# EAGLE board inputsheild_4 (EAGLE 9.3.0)
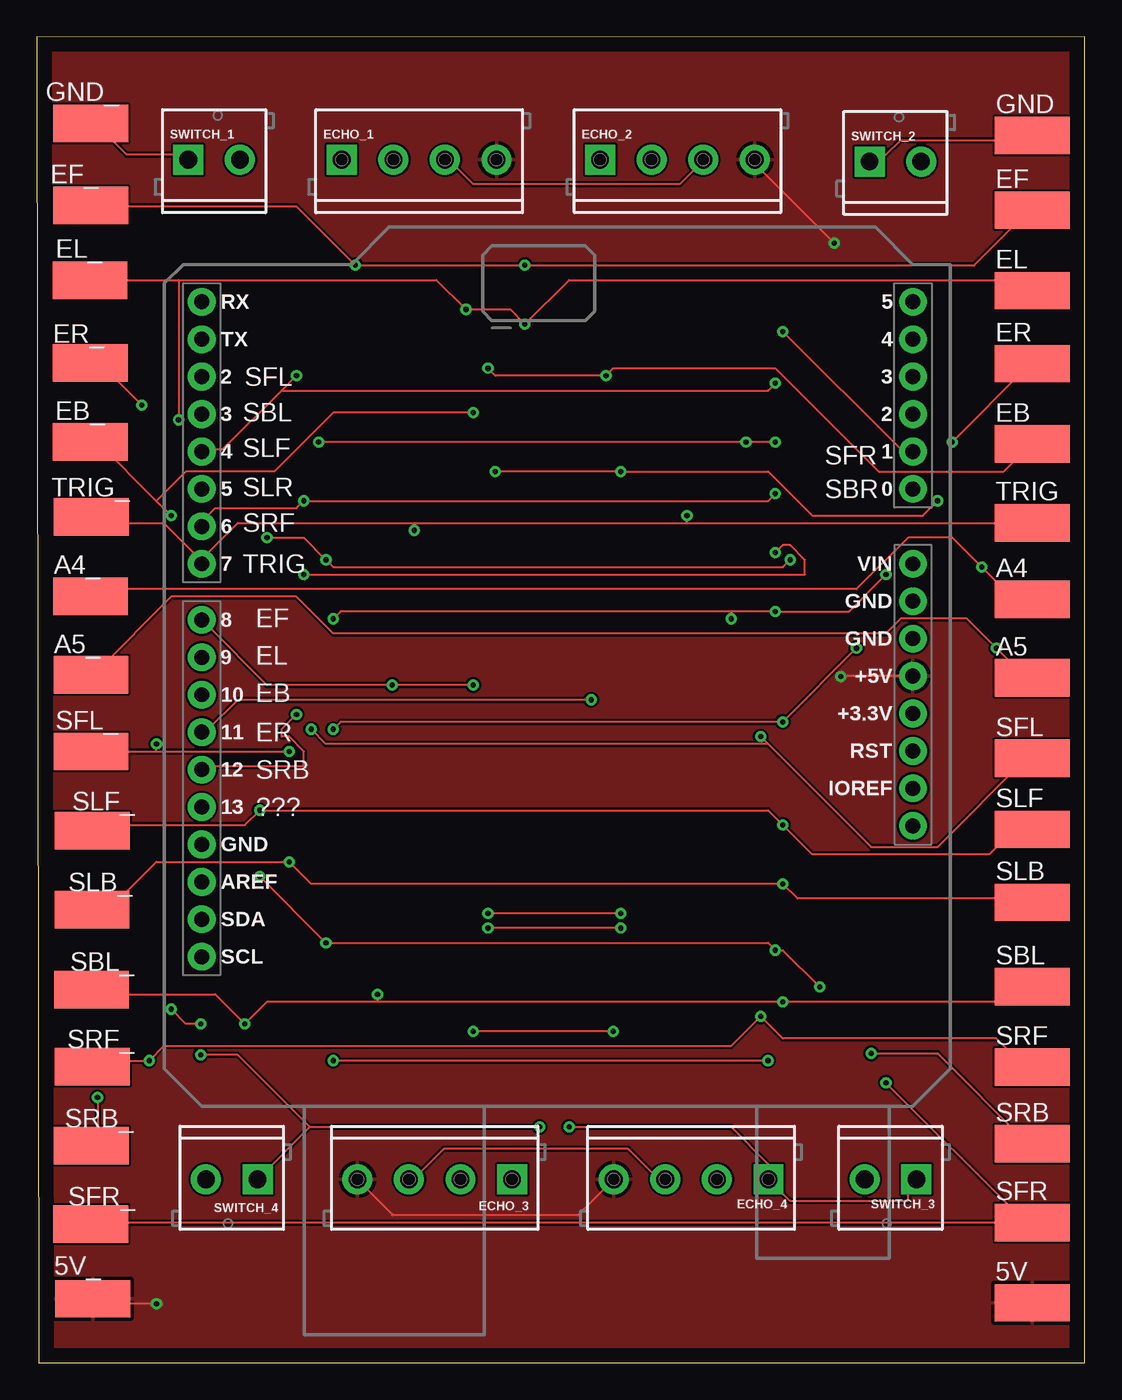
[diagram p0: board, top side]
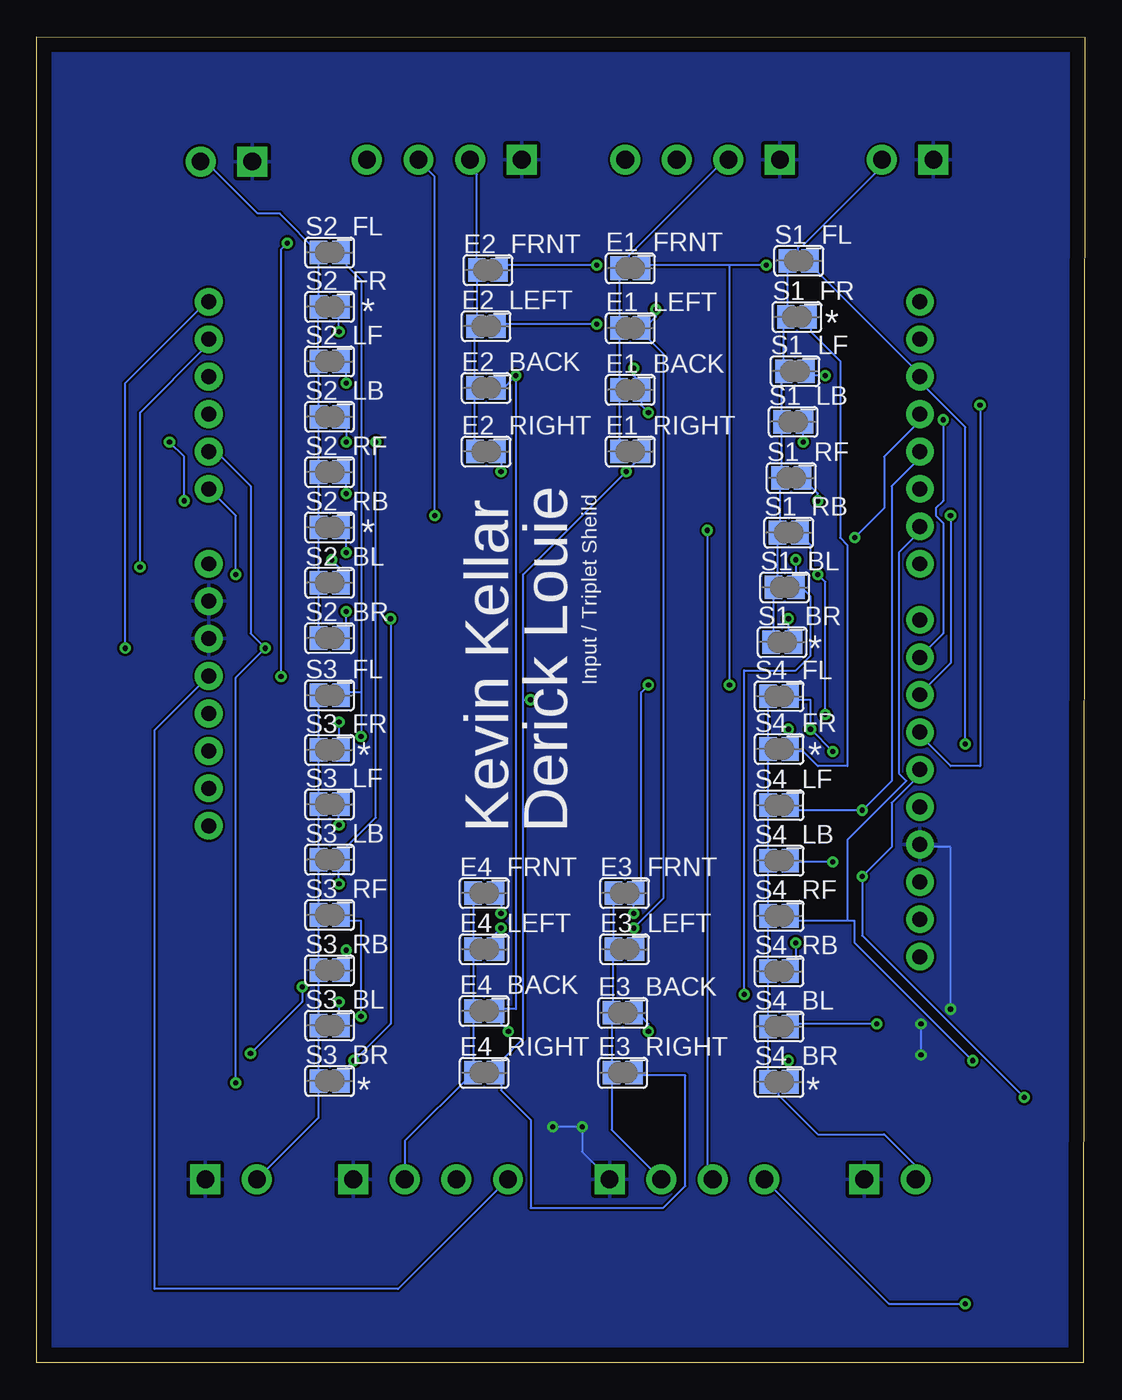
[diagram p1: board, bottom side, seen from below]

Size 71.12 x 90 mm. Coordinates in mm from the lower left corner, seen from the top.
Outline: 0.12,0 71.12,0 71.12,90 0,89.98 0.12,0
Copper layers (1*16): Top 0.035mm / dielectric 1.5mm / Bottom 0.035mm
Design rules "default": minimum track width 6mil, minimum drill 0.35mm, track to track 6mil, track to pad 6mil, pad to pad 6mil, via to via 6mil, smd to smd 6mil, copper to edge 40mil, drill to drill 6mil, minimum pad ring 10mil, minimum via ring 8mil, stop-mask expansion 4mil, vias tented up to drill 0mil, thermal gap 10mil

## Footprints (pad centres in the part's own frame; a part is rotated, then mirrored left to right if it is on the bottom)
SMD2,54-5,08 = smd 2.54 x 5.08: 1 0,0
UNO_R3_SHIELD = drill 1.016 pad 1.88: 3.3V 24.13,-2.54; 5V 24.13,0; A0 24.13,12.7; A1 24.13,15.24; A2 24.13,17.78; A3 24.13,20.32; A4 24.13,22.86; A5 24.13,25.4; AREF -24.13,-13.97; D2 -24.13,20.32; D3 -24.13,17.78; D4 -24.13,15.24; D5 -24.13,12.7; D6 -24.13,10.16; D7 -24.13,7.62; D8 -24.13,3.81; D9 -24.13,1.27; D10 -24.13,-1.27; D11 -24.13,-3.81; D12 -24.13,-6.35; D13 -24.13,-8.89; GND@0 24.13,2.54; GND@1 24.13,5.08; GND@2 -24.13,-11.43; IOREF 24.13,-7.62; NC 24.13,-10.16; RES 24.13,-5.08; RX -24.13,25.4; SCL -24.13,-19.05; SDA -24.13,-16.51; TX -24.13,22.86; VIN 24.13,7.62
SJ = smd 1.168 x 1.6: 1 -0.762,0; 2 0.762,0
SCREWTERMINAL-3.5MM-4 = drill 1.2 pad 2.032 square: 1 0,0 | drill 1.2 pad 2.032: 2 3.5,0; 3 7,0; 4 10.5,0
SCREWTERMINAL-3.5MM-2 = drill 1.2 pad 2.032 square: 1 0,0 | drill 1.2 pad 2.032: 2 3.5,0

## Placement (x,y rotation side)
5V  [SMD2,54-5,08]  67.55,4.06 270 top
5V_  [SMD2,54-5,08]  3.78,4.34 90 top
A4  [SMD2,54-5,08]  67.55,51.82 270 top
A4_  [SMD2,54-5,08]  3.64,52.04 270 top
A5  [SMD2,54-5,08]  67.55,46.48 270 top
A5_  [SMD2,54-5,08]  3.67,46.7 270 top
B1  ARDUINO_UNO_R3_SHIELDBASIC  [UNO_R3_SHIELD]  35.32,46.61 0 top
E1_BACK  [SJ]  30.85,66.04 0 bottom
E1_FRNT  [SJ]  30.85,74.3 0 bottom
E1_LEFT  [SJ]  30.85,70.23 0 bottom
E1_RIGHT  [SJ]  30.85,61.85 0 bottom
E2_BACK  [SJ]  40.63,66.17 0 bottom
E2_FRNT  [SJ]  40.5,74.17 0 bottom
E2_LEFT  [SJ]  40.63,70.36 0 bottom
E2_RIGHT  [SJ]  40.63,61.85 0 bottom
E3_BACK  [SJ]  31.36,23.75 0 bottom
E3_FRNT  [SJ]  31.23,31.88 0 bottom
E3_LEFT  [SJ]  31.23,28.07 0 bottom
E3_RIGHT  [SJ]  31.36,19.68 0 bottom
E4_BACK  [SJ]  40.76,23.88 0 bottom
E4_FRNT  [SJ]  40.76,31.88 0 bottom
E4_LEFT  [SJ]  40.76,28.07 0 bottom
E4_RIGHT  [SJ]  40.76,19.68 0 bottom
EB  [SMD2,54-5,08]  67.55,62.36 270 top
EB_  [SMD2,54-5,08]  3.62,62.51 270 top
ECHO_1  [SCREWTERMINAL-3.5MM-4]  20.69,81.66 0 top
ECHO_2  [SCREWTERMINAL-3.5MM-4]  38.22,81.66 0 top
ECHO_3  [SCREWTERMINAL-3.5MM-4]  32.25,12.45 180 top
ECHO_4  [SCREWTERMINAL-3.5MM-4]  49.65,12.45 180 top
EF  [SMD2,54-5,08]  67.55,78.23 270 top
EF_  [SMD2,54-5,08]  3.67,78.55 90 top
EL  [SMD2,54-5,08]  67.55,72.77 270 top
EL_  [SMD2,54-5,08]  3.6,73.46 270 top
ER  [SMD2,54-5,08]  67.55,67.82 270 top
ER_  [SMD2,54-5,08]  3.62,67.87 270 top
GND  [SMD2,54-5,08]  67.55,83.31 270 top
GND_  [SMD2,54-5,08]  3.65,84.12 90 top
S1_BL  [SJ]  20.37,52.63 0 bottom
S1_BR  [SJ]  20.54,48.91 0 bottom
S1_FL  [SJ]  19.41,74.8 0 bottom
S1_FR  [SJ]  19.54,70.98 0 bottom
S1_LB  [SJ]  19.79,63.87 0 bottom
S1_LF  [SJ]  19.67,67.3 0 bottom
S1_RB  [SJ]  20.1,56.35 0 bottom
S1_RF  [SJ]  19.92,60.05 0 bottom
S2_BL  [SJ]  51.25,52.94 0 bottom
S2_BR  [SJ]  51.25,49.19 0 bottom
S2_FL  [SJ]  51.25,75.36 0 bottom
S2_FR  [SJ]  51.25,71.67 0 bottom
S2_LB  [SJ]  51.25,64.21 0 bottom
S2_LF  [SJ]  51.25,67.97 0 bottom
S2_RB  [SJ]  51.25,56.7 0 bottom
S2_RF  [SJ]  51.25,60.46 0 bottom
S3_BL  [SJ]  51.25,22.88 0 bottom
S3_BR  [SJ]  51.25,19.12 0 bottom
S3_FL  [SJ]  51.25,45.3 0 bottom
S3_FR  [SJ]  51.25,41.6 0 bottom
S3_LB  [SJ]  51.25,34.15 0 bottom
S3_LF  [SJ]  51.25,37.9 0 bottom
S3_RB  [SJ]  51.25,26.64 0 bottom
S3_RF  [SJ]  51.25,30.39 0 bottom
S4_BL  [SJ]  20.75,22.82 0 bottom
S4_BR  [SJ]  20.75,19.06 0 bottom
S4_FL  [SJ]  20.75,45.24 0 bottom
S4_FR  [SJ]  20.75,41.66 0 bottom
S4_LB  [SJ]  20.75,34.08 0 bottom
S4_LF  [SJ]  20.75,37.84 0 bottom
S4_RB  [SJ]  20.75,26.57 0 bottom
S4_RF  [SJ]  20.75,30.33 0 bottom
SBL  [SMD2,54-5,08]  67.55,25.53 270 top
SBL_  [SMD2,54-5,08]  3.71,25.33 90 top
SFL  [SMD2,54-5,08]  67.55,41.02 270 top
SFL_  [SMD2,54-5,08]  3.67,41.49 90 top
SFR  [SMD2,54-5,08]  67.55,9.53 270 top
SFR_  [SMD2,54-5,08]  3.67,9.39 90 top
SLB  [SMD2,54-5,08]  67.55,31.24 270 top
SLB_  [SMD2,54-5,08]  3.75,30.76 90 top
SLF  [SMD2,54-5,08]  67.55,36.2 270 top
SLF_  [SMD2,54-5,08]  3.75,36.11 90 top
SRB  [SMD2,54-5,08]  67.55,14.86 270 top
SRB_  [SMD2,54-5,08]  3.69,14.72 90 top
SRF  [SMD2,54-5,08]  67.55,20.07 270 top
SRF_  [SMD2,54-5,08]  3.75,20.09 90 top
SWITCH_1  [SCREWTERMINAL-3.5MM-2]  10.28,81.66 0 top
SWITCH_2  [SCREWTERMINAL-3.5MM-2]  56.51,81.53 0 top
SWITCH_3  [SCREWTERMINAL-3.5MM-2]  59.68,12.45 180 top
SWITCH_4  [SCREWTERMINAL-3.5MM-2]  14.98,12.45 180 top
TRIG  [SMD2,54-5,08]  67.55,57.02 270 top
TRIG_  [SMD2,54-5,08]  3.68,57.42 270 top

## Library data of the parts
5V 5V_ A4 A4_ A5 A5_ EB EB_ EF EF_ EL EL_ ER ER_ GND GND_ SBL SBL_ SFL SFL_ SFR SFR_ SLB SLB_ SLF SLF_ SRB SRB_ SRF SRF_ TRIG TRIG_ = wirepad
B1 = SparkFun-Boards
E1_BACK E1_FRNT E1_LEFT E1_RIGHT E2_BACK E2_FRNT E2_LEFT E2_RIGHT E3_BACK E3_FRNT E3_LEFT E3_RIGHT E4_BACK E4_FRNT E4_LEFT E4_RIGHT S1_BL S1_BR S1_FL S1_FR S1_LB S1_LF S1_RB S1_RF S2_BL S2_BR S2_FL S2_FR S2_LB S2_LF S2_RB S2_RF S3_BL S3_BR S3_FL S3_FR S3_LB S3_LF S3_RB S3_RF S4_BL S4_BR S4_FL S4_FR S4_LB S4_LF S4_RB S4_RF = jumper
ECHO_1-ECHO_4 = SparkFun-Connectors; PROD_ID: 2xCONN-08399; SF_ID: 2xPRT-08084
SWITCH_1-SWITCH_4 = SparkFun-Connectors; PROD_ID: CONN-08399

## Nets
+5V: 5V.1 5V_.1 B1.5V ECHO_1.4 ECHO_2.4 ECHO_3.4 ECHO_4.4
A4: A4.1 A4_.1 B1.A4
A5: A5.1 A5_.1 B1.A5
E1: E1_BACK.1 E1_FRNT.1 E1_LEFT.1 E1_RIGHT.1 ECHO_1.2
E2: E2_BACK.1 E2_FRNT.1 E2_LEFT.1 E2_RIGHT.1 ECHO_2.2
E3: E3_BACK.1 E3_FRNT.1 E3_LEFT.1 E3_RIGHT.1 ECHO_3.2
E4: E4_BACK.1 E4_FRNT.1 E4_LEFT.1 E4_RIGHT.1 ECHO_4.2
EB: B1.D10 E1_BACK.2 E2_BACK.2 E3_BACK.2 E4_BACK.2 EB.1 EB_.1
EF: B1.D8 E1_FRNT.2 E2_FRNT.2 E3_FRNT.2 E4_FRNT.2 EF.1 EF_.1
EL: B1.D9 E1_LEFT.2 E2_LEFT.2 E3_LEFT.2 E4_LEFT.2 EL.1 EL_.1
ER: B1.D11 E1_RIGHT.2 E2_RIGHT.2 E3_RIGHT.2 E4_RIGHT.2 ER.1 ER_.1
GND: B1.GND@0 B1.GND@1 B1.GND@2 ECHO_1.1 ECHO_2.1 ECHO_3.1 ECHO_4.1 GND.1 GND_.1 SWITCH_1.1 SWITCH_2.1 SWITCH_3.1 SWITCH_4.1
S1: S1_BL.1 S1_BR.1 S1_FL.1 S1_FR.1 S1_LB.1 S1_LF.1 S1_RB.1 S1_RF.1 SWITCH_1.2
S2: S2_BL.1 S2_BR.1 S2_FL.1 S2_FR.1 S2_LB.1 S2_LF.1 S2_RB.1 S2_RF.1 SWITCH_2.2
S3: S3_BL.1 S3_BR.1 S3_FL.1 S3_FR.1 S3_LB.1 S3_LF.1 S3_RB.1 S3_RF.1 SWITCH_3.2
S4: S4_BL.1 S4_BR.1 S4_FL.1 S4_FR.1 S4_LB.1 S4_LF.1 S4_RB.1 S4_RF.1 SWITCH_4.2
SBL: B1.D3 S1_BL.2 S2_BL.2 S3_BL.2 S4_BL.2 SBL.1 SBL_.1
SBR: B1.A0 S1_BR.2 S2_BR.2 S3_BR.2 S4_BR.2
SFL: B1.D2 S1_FL.2 S2_FL.2 S3_FL.2 S4_FL.2 SFL.1 SFL_.1
SFR: B1.A1 S1_FR.2 S2_FR.2 S3_FR.2 S4_FR.2 SFR.1 SFR_.1
SLB: S1_LB.2 S2_LB.2 S3_LB.2 S4_LB.2 SLB.1 SLB_.1
SLF: B1.D4 S1_LF.2 S2_LF.2 S3_LF.2 S4_LF.2 SLF.1 SLF_.1
SLR: B1.D5
SRB: B1.D12 S1_RB.2 S2_RB.2 S3_RB.2 S4_RB.2 SRB.1 SRB_.1
SRF: B1.D6 S1_RF.2 S2_RF.2 S3_RF.2 S4_RF.2 SRF.1 SRF_.1
TRIG: B1.D7 ECHO_1.3 ECHO_2.3 ECHO_3.3 ECHO_4.3 TRIG.1 TRIG_.1

## Tracks (layer width: path | path; a pad name or v marks a point on that pad's centre or on a via)
+5V  (via drill 0.35)
  Top 0.152: ECHO_4.4 36.7,10 24.12,10 24.12,10.08 ECHO_3.4 | v8.12,4 4.12,4 5V_.1 | B1.5V 54.58,46.61 v54.55,46.57 | v54.12,76 48.72,81.4 ECHO_2.4
  Bottom 0.152: ECHO_3.4 13.3,4 v8.12,4 | ECHO_4.4 46.59,5 63.12,5 63.12,42.94 B1.5V | v54.55,46.57 54.55,75.57 v54.12,76
  pour Top: 0.12,90 71.12,90 71.12,0 0.12,0
A4  (via drill 0.35)
  Top 0.152: A4.1 67.12,52 66.12,52 v64.12,54 62.12,56 59.12,56 55.62,52.5 4.12,52.5 A4_.1
  Bottom 0.152: v64.12,54 64.12,64.5 59.62,69 B1.A4
A5  (via drill 0.35)
  Top 0.152: A5.1 67.12,46.5 v65.12,48.5 63.12,50.5 58.62,50.5 57.62,49.5 20.12,49.5 17.62,52 9.12,52 4.12,47 A5_.1
  Bottom 0.152: v65.12,48.5 65.12,66.5 59.62,72 B1.A5
E1
  Bottom 0.152: ECHO_1.2 24.43,81.66 30.9,75.19 30.9,75.01 E1_FRNT.1 E1_LEFT.1 E1_BACK.1 E1_RIGHT.1
E2
  Bottom 0.152: E2_RIGHT.1 E2_BACK.1 41.39,70 | 41.39,70 E2_LEFT.1 | 41.39,70 41.27,70.13 E2_FRNT.1 41.27,80.65 41.72,81.1 ECHO_2.2
E3
  Bottom 0.152: E3_FRNT.1 E3_LEFT.1 31.99,28 31.99,27.62 31.99,23.88 E3_BACK.1 E3_RIGHT.1 32.12,15.82 ECHO_3.2
E4
  Bottom 0.152: E4_FRNT.1 E4_LEFT.1 E4_BACK.1 E4_RIGHT.1 46.15,15.06 ECHO_4.2
EB  (via drill 0.35)
  Top 0.152: 8.12,58.5 4.12,62.5 EB_.1 | 8.12,58.5 v9.12,57.5 | v39.12,22.5 v29.62,22.5 | v30.62,67.5 31.12,67 v38.62,67 39.12,67.5 50.12,67.5 57.12,60.5 65.62,60.5 67.12,62 EB.1 | 8.12,58.5 10.12,60.5 16.12,60.5 20.12,64.5 v29.62,64.5
  Bottom 0.152: v9.12,57.5 9.12,47.5 11.12,45.5 B1.D10 | v29.62,22.5 29.62,23 30.12,23.5 E3_BACK.2 | v39.12,22.5 39.62,23 39.62,23.5 E4_BACK.2 39.62,24 38.62,24 v38.62,67 39.62,66 E2_BACK.2 | v30.62,67.5 30.62,67 30.12,66.5 E1_BACK.2 30.12,66 30.12,65 v29.62,64.5
EF  (via drill 0.35)
  Top 0.152: v39.62,30.5 v30.62,30.5 | v29.62,46 v24.12,46 15.62,46 11.62,50 B1.D8 | EF_.1 4.12,78.5 17.62,78.5 v21.62,74.5 v33.12,74.5 63.62,74.5 67.12,78 EF.1
  Bottom 0.152: v30.62,30.5 30.62,31.5 E3_FRNT.2 30.12,32 30.12,45.5 v29.62,46 | v39.62,30.5 39.62,31.5 E4_FRNT.2 | v21.62,74.5 24.12,74.5 | 24.12,74.5 29.62,74.5 E1_FRNT.2 | v33.12,74.5 39.62,74.5 E2_FRNT.2 | 24.12,74.5 v24.12,46
EL  (via drill 0.35)
  Top 0.152: v39.62,29.5 v30.62,29.5 | 9.62,73.5 3.62,73.5 EL_.1 | 9.62,73.5 27.12,73.5 v29.12,71.5 32.12,71.5 v33.12,70.5 36.12,73.5 66.62,73.5 67.12,73 EL.1 | 9.62,73.5 v9.62,64
  Bottom 0.152: v39.62,29.5 40.12,29 40.12,28.5 E4_LEFT.2 | E3_LEFT.2 30.62,28.5 v30.62,29.5 28.62,31.5 28.62,68.5 29.62,69.5 29.62,70 E1_LEFT.2 29.62,70.5 29.12,71 v29.12,71.5 | v33.12,70.5 39.62,70.5 E2_LEFT.2 | v9.62,64 9.62,58.5 10.12,58 10.12,57.5 9.62,57 9.62,49.5 11.12,48 B1.D9
ER  (via drill 0.35)
  Top 0.152: v7.12,65 4.62,67.5 4.12,67.5 ER_.1 | v31.12,60.5 v39.62,60.5 49.62,60.5 52.62,57.5 60.12,57.5 v61.12,58.5 | v62.12,62.5 67.12,67.5 ER.1 | v37.62,45 13.62,45 11.62,43 B1.D11
  Bottom 0.152: v7.12,65 7.12,40.5 9.12,40.5 11.12,42.5 B1.D11 | v39.62,60.5 39.62,61.5 E2_RIGHT.2 | E1_RIGHT.2 30.12,61.5 v31.12,60.5 38.12,53.5 38.12,45 | E3_RIGHT.2 30.12,19.5 27.12,19.5 27.12,12 28.62,10.5 37.62,10.5 37.62,16.5 39.62,18.5 39.62,19.5 E4_RIGHT.2 39.62,20 39.62,20.5 38.12,22 38.12,45 | v62.12,62.5 61.12,61.5 v61.12,58.5 | 38.12,45 v37.62,45
GND  (via drill 0.35)
  Top 0.152: GND_.1 4.12,84 6.12,82 10.12,82 SWITCH_1.1 | GND.1 67.12,83 58.62,83 57.62,82 56.62,82 SWITCH_2.1 | SWITCH_4.1 18.53,16 | 18.53,16 v34.12,16 | v36.12,16 47.12,16 49.65,13.47 ECHO_4.1 51.09,11 59.12,11 59.12,11.88 SWITCH_3.1 | 18.53,16 13.64,20.89 v11.12,20.89 | v11.12,23 10.12,23 v9.12,24
  Bottom 0.152: ECHO_3.1 34.12,14.31 v34.12,16 v36.12,16 | v11.12,20.89 v11.12,23 | v9.12,24 9.12,35 11.12,35 11.12,35.1 B1.GND@2
  pour Bottom: 0.12,0 71.12,0 71.12,90 0.12,90
S1
  Bottom 0.152: S1_BR.1 21.13,49.08 S1_BL.1 20.86,52.9 S1_RB.1 20.68,56.52 S1_RF.1 20.56,60.18 S1_LB.1 20.56,67.17 S1_LF.1 20.43,70.86 S1_FR.1 20.18,71.11 S1_FL.1 19.46,75.51 19.46,75.69 19.33,75.82 19.15,75.82 13.78,81.19 SWITCH_1.2
S2
  Bottom 0.152: S2_BR.1 S2_BL.1 S2_RB.1 S2_RF.1 S2_LB.1 S2_LF.1 S2_FR.1 S2_FL.1 54.63,77.99 54.62,78 56.12,78 59.62,81.5 SWITCH_2.2
S3
  Bottom 0.152: S3_FL.1 S3_FR.1 S3_LF.1 S3_LB.1 S3_RF.1 S3_RB.1 S3_BL.1 S3_BR.1 52.01,16.62 SWITCH_3.2
S4
  Bottom 0.152: S4_FL.1 S4_FR.1 S4_LF.1 S4_LB.1 S4_RF.1 S4_RB.1 S4_BL.1 S4_BR.1 20.8,18.35 20.8,18.16 18.13,15.5 13.62,15.5 11.48,13.36 SWITCH_4.2
SBL  (via drill 0.35)
  Top 0.152: v15.62,56 18.12,56 v19.62,54.5 20.12,54 50.62,54 v51.12,54.5 | SBL_.1 4.12,25 12.12,25 v14.12,23 15.62,24.5 23.12,24.5 | SBL.1 67.12,25.5 66.12,24.5 v50.62,24.5 23.12,24.5 | 23.12,24.5 v23.12,25
  Bottom 0.152: v19.62,54.5 19.62,53 S1_BL.2 19.12,52.5 18.62,52 18.62,48 19.62,47 23.12,47 v23.12,25 | v15.62,56 13.62,58 13.62,61.5 11.62,63.5 11.62,64 B1.D3 | v51.12,54.5 50.62,54 50.62,53 S2_BL.2 | v14.12,23 19.62,23 S4_BL.2 | v50.62,24.5 50.62,23 S3_BL.2
SBR  (via drill 0.35)
  Top 0.152: v49.62,20.5 v20.12,20.5 | v20.12,50.5 20.62,51 47.12,51 | 47.12,51 v50.12,51 55.12,51 v57.62,53.5 | 47.12,51 v47.12,50.5
  Bottom 0.152: v20.12,20.5 20.12,19.5 S4_BR.2 | S3_BR.2 50.12,19.5 50.12,20 v49.62,20.5 47.12,23 v47.12,50.5 | v20.12,50.5 20.12,49 S1_BR.2 | v50.12,51 50.12,49.5 S2_BR.2 | v57.62,53.5 57.62,57.5 59.12,59 B1.A0
SFL  (via drill 0.35)
  Top 0.152: 8.12,41.5 4.12,41.5 SFL_.1 | 8.12,41.5 v17.12,41.5 | 8.12,41.5 v8.12,42 | v49.12,42.5 49.62,42 | 49.62,42 56.62,35 61.12,35 67.12,41 SFL.1 | v18.62,43 19.62,42 49.62,42
  Bottom 0.152: S1_FL.2 18.62,74.5 11.62,67.5 11.62,67 B1.D2 11.12,66.5 8.12,63.5 v8.12,42 | v17.12,41.5 v18.62,43 18.62,45 19.62,45 S4_FL.2 | 49.12,45.5 50.12,45.5 S3_FL.2 | 49.12,45.5 49.12,73.5 50.12,74.5 50.12,75 S2_FL.2 | 49.12,45.5 v49.12,42.5
SFR  (via drill 0.35)
  Top 0.152: v55.62,48.5 v50.62,43.5 20.62,43.5 v20.12,43 | v50.62,70 58.62,62 59.12,62 B1.A1 | SFR_.1 4.12,9.5 67.12,9.5 SFR.1 67.12,10 66.62,10 v57.62,19
  Bottom 0.152: S1_FR.2 18.62,70.5 18.62,70 16.62,68 16.62,56 16.12,55.5 16.12,40.5 18.12,40.5 19.12,41.5 19.62,41.5 S4_FR.2 20.12,42 v20.12,43 | v50.62,43.5 50.62,42 S3_FR.2 | B1.A1 59.12,62 56.62,59.5 56.62,49.5 v55.62,48.5 57.62,46.5 v57.62,19 | v50.62,70 50.62,71.5 S2_FR.2
SLB  (via drill 0.35)
  Top 0.152: v50.12,62.5 v48.12,62.5 v19.12,62.5 | SLB_.1 4.12,31 5.12,31 8.12,34 v17.12,34 18.62,32.5 v50.62,32.5 51.62,31.5 67.12,31.5 SLB.1
  Bottom 0.152: v19.12,62.5 19.12,63.5 S1_LB.2 | v50.12,62.5 50.12,64 S2_LB.2 | v17.12,34 19.62,34 S4_LB.2 | v50.62,32.5 50.62,34 S3_LB.2 50.12,34.5 50.12,35 48.12,37 v48.12,62.5
SLF  (via drill 0.35)
  Top 0.152: SLF.1 67.12,36 66.12,36 64.62,34.5 52.62,34.5 v50.62,36.5 49.62,37.5 v15.12,37.5 14.12,36.5 4.12,36.5 SLF_.1 | 16.62,66 12.62,62 11.62,62 B1.D4 | 16.62,66 v17.62,67 | v50.12,66.5 49.62,66 16.62,66
  Bottom 0.152: v50.62,36.5 50.62,37.5 S3_LF.2 | S4_LF.2 19.62,37.5 v15.12,37.5 13.12,39.5 13.12,59.5 11.62,61 11.62,61.5 B1.D4 | v17.62,67 18.62,67 S1_LF.2 | v50.12,66.5 50.12,67.5 S2_LF.2
SRB  (via drill 0.35)
  Top 0.152: v15.12,33 v19.62,28.5 49.62,28.5 v50.12,28 50.62,28 v53.12,25.5 | v17.62,44 16.62,43 16.62,42.5 17.12,42.5 18.12,41.5 18.12,40.5 11.62,40.5 B1.D12 | v50.12,55 50.62,55.5 51.12,55.5 52.12,54.5 52.12,53.5 v18.12,53.5 | v4.12,18 4.12,15 SRB_.1 | v56.62,21 61.12,21 67.12,15 SRB.1
  Bottom 0.152: v19.62,28.5 19.62,27 S4_RB.2 | B1.D12 11.62,40 11.62,39.5 13.12,38 13.12,35 v15.12,33 15.12,29 v4.12,18 | v50.12,28 50.12,27 S3_RB.2 | v17.62,44 17.62,53 v18.12,53.5 18.62,54 18.62,55.5 19.12,56 S1_RB.2 | v50.12,55 50.12,56.5 S2_RB.2 | v56.62,21 53.12,24.5 v53.12,25.5
SRF  (via drill 0.35)
  Top 0.152: SRF.1 67.12,20.5 66.62,20.5 65.12,22 50.62,22 v49.12,23.5 47.12,21.5 8.62,21.5 v7.62,20.5 4.12,20.5 SRF_.1 | B1.D6 11.12,57 12.12,58 17.62,58 v18.12,58.5 49.62,58.5 v50.12,59
  Bottom 0.152: v49.12,23.5 49.12,30 50.12,30 S3_RF.2 | 16.12,30 15.62,30 15.62,28.5 v7.62,20.5 | 16.12,30 19.62,30 S4_RF.2 | v18.12,58.5 18.12,59 19.12,60 S1_RF.2 | v50.12,59 50.12,60 S2_RF.2 | 16.12,30 16.12,35.5 12.12,39.5 12.62,40 12.62,55 11.62,56 11.62,56.5 B1.D6
TRIG  (via drill 0.35)
  Top 0.152: ECHO_1.3 28.12,81.5 29.62,80 43.62,80 45.12,81.5 ECHO_2.3 | ECHO_3.3 25.62,12.5 27.62,14.5 40.12,14.5 42.12,12.5 42.62,12.5 ECHO_4.3 | 10.62,55 8.62,57 4.12,57 TRIG_.1 | 10.62,55 11.12,54.5 B1.D7 | 25.62,57 13.62,57 11.62,55 10.62,55 | 25.62,57 44.12,57 | 44.12,57 67.12,57 TRIG.1 | 25.62,57 v25.62,56.5 | 44.12,57 v44.12,57.5
  Bottom 0.152: v25.62,56.5 25.62,12.5 ECHO_3.3 | v44.12,57.5 44.12,80.5 45.12,81.5 ECHO_2.3

## Text on the board
tNames: SFL | SBL | SLF | SFR | SLR | SBR | SRF | TRIG | EF | EL | EB | ER | SRB | ???
bNames: * | * | * | * | Input / Triplet Sheild | * | * | Derick Louie | Kevin Kellar | * | *